# Altium PCB Main.PcbDoc (part 2 of 3)
Units mm, origin at the board's own origin, x right, y up, seen from the top; angles counter-clockwise.
Board outline 231.52 x 36.7 mm, 2 copper layers (Top Layer, Bottom Layer); 134 components, 130 nets, 558 pads, 347 vias.
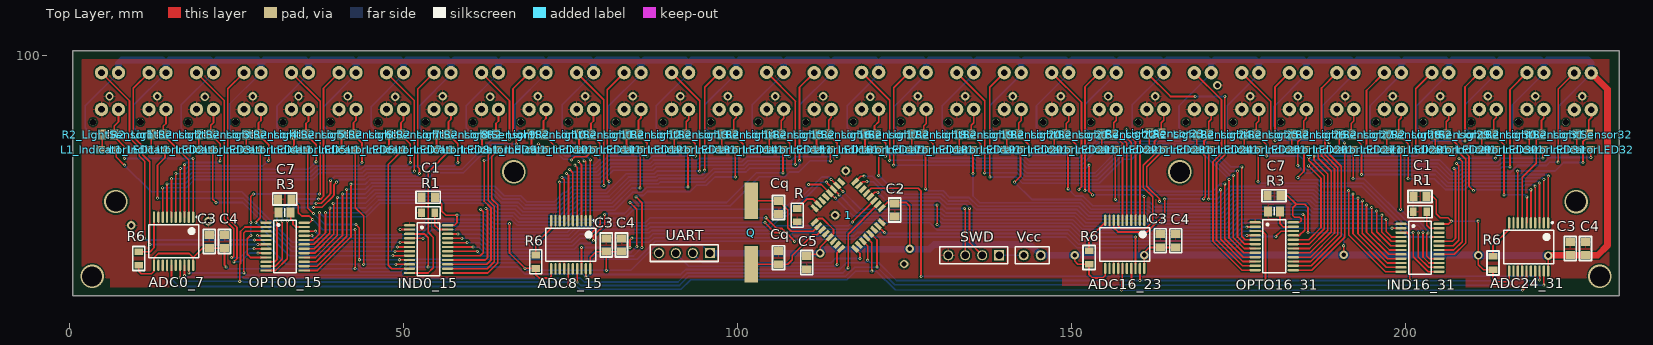
[diagram p0: Top Layer view]

## Via types
v1: diameter 0.45, hole 0.2, Top Layer to Bottom Layer, 297 vias
v2: diameter 1.27, hole 0.711, Top Layer to Bottom Layer, 44 vias
v3: diameter 3.5, hole 3, Top Layer to Bottom Layer, 6 vias

## Nets (pads, with @x,y where several pads share a name; then routed paths per layer and width w, separated by ;. In a path a pad name is that pad's centre, name@x,y a point inside that pad or via, vN(x,y) a via of type N, cw(c..) or ccw(c..) an arc to the next point about the centre after c; other vN are vias at no path point) (continued)
LED_IND14: (continued)
  Bottom Layer w0.254: v1(61.087,70.672) 61.782,69.977 84.452,69.977 v1(85.722,71.247) ; v1(84.836,78.825) 85.034,79.023 85.932,79.023 86.538,79.629 92.964,79.629 93.882,80.547 95.373,80.547 96.614,81.788 v1(99.695,81.788)